# Altium PCB main_pcb.PcbDoc
Units mil, origin at the board's own origin, x right, y up, seen from the top; angles counter-clockwise.
Board outline 6000 x 4000 mil, 2 copper layers (Top Layer, Bottom Layer); 33 components, 41 nets, 316 pads, 14 vias.
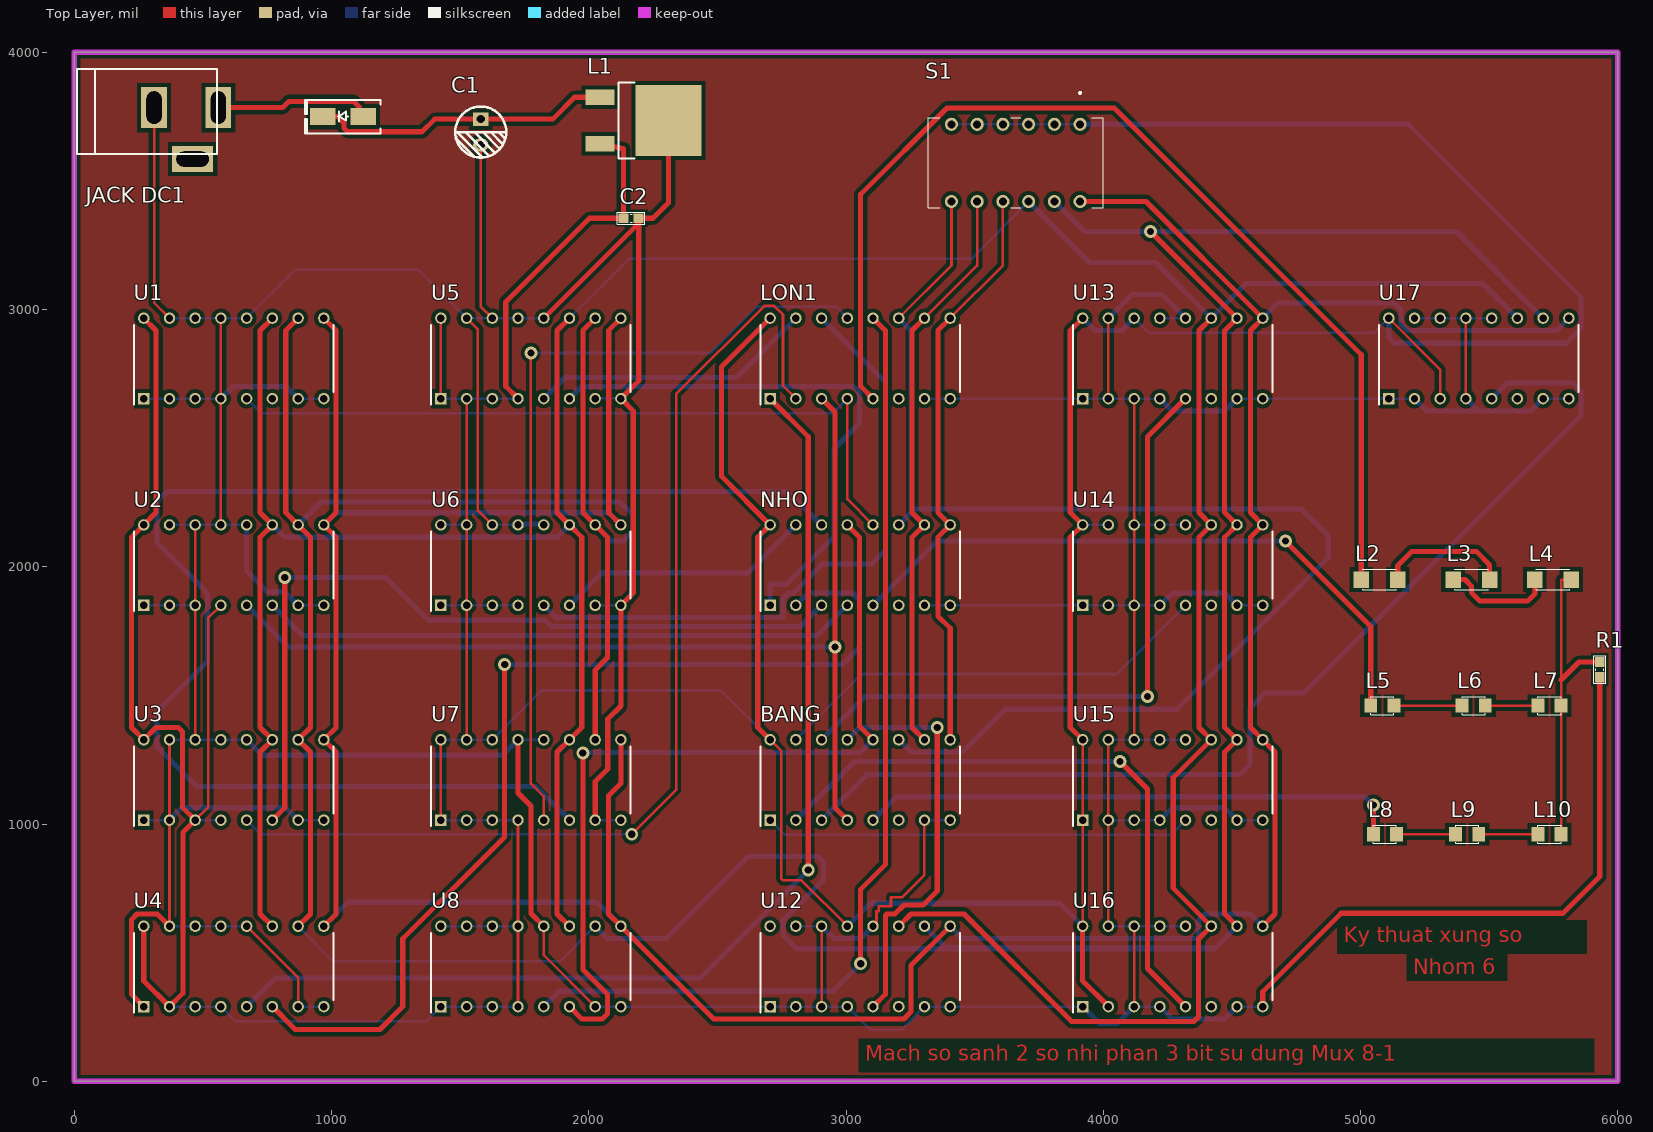
[diagram p0: Top Layer view]
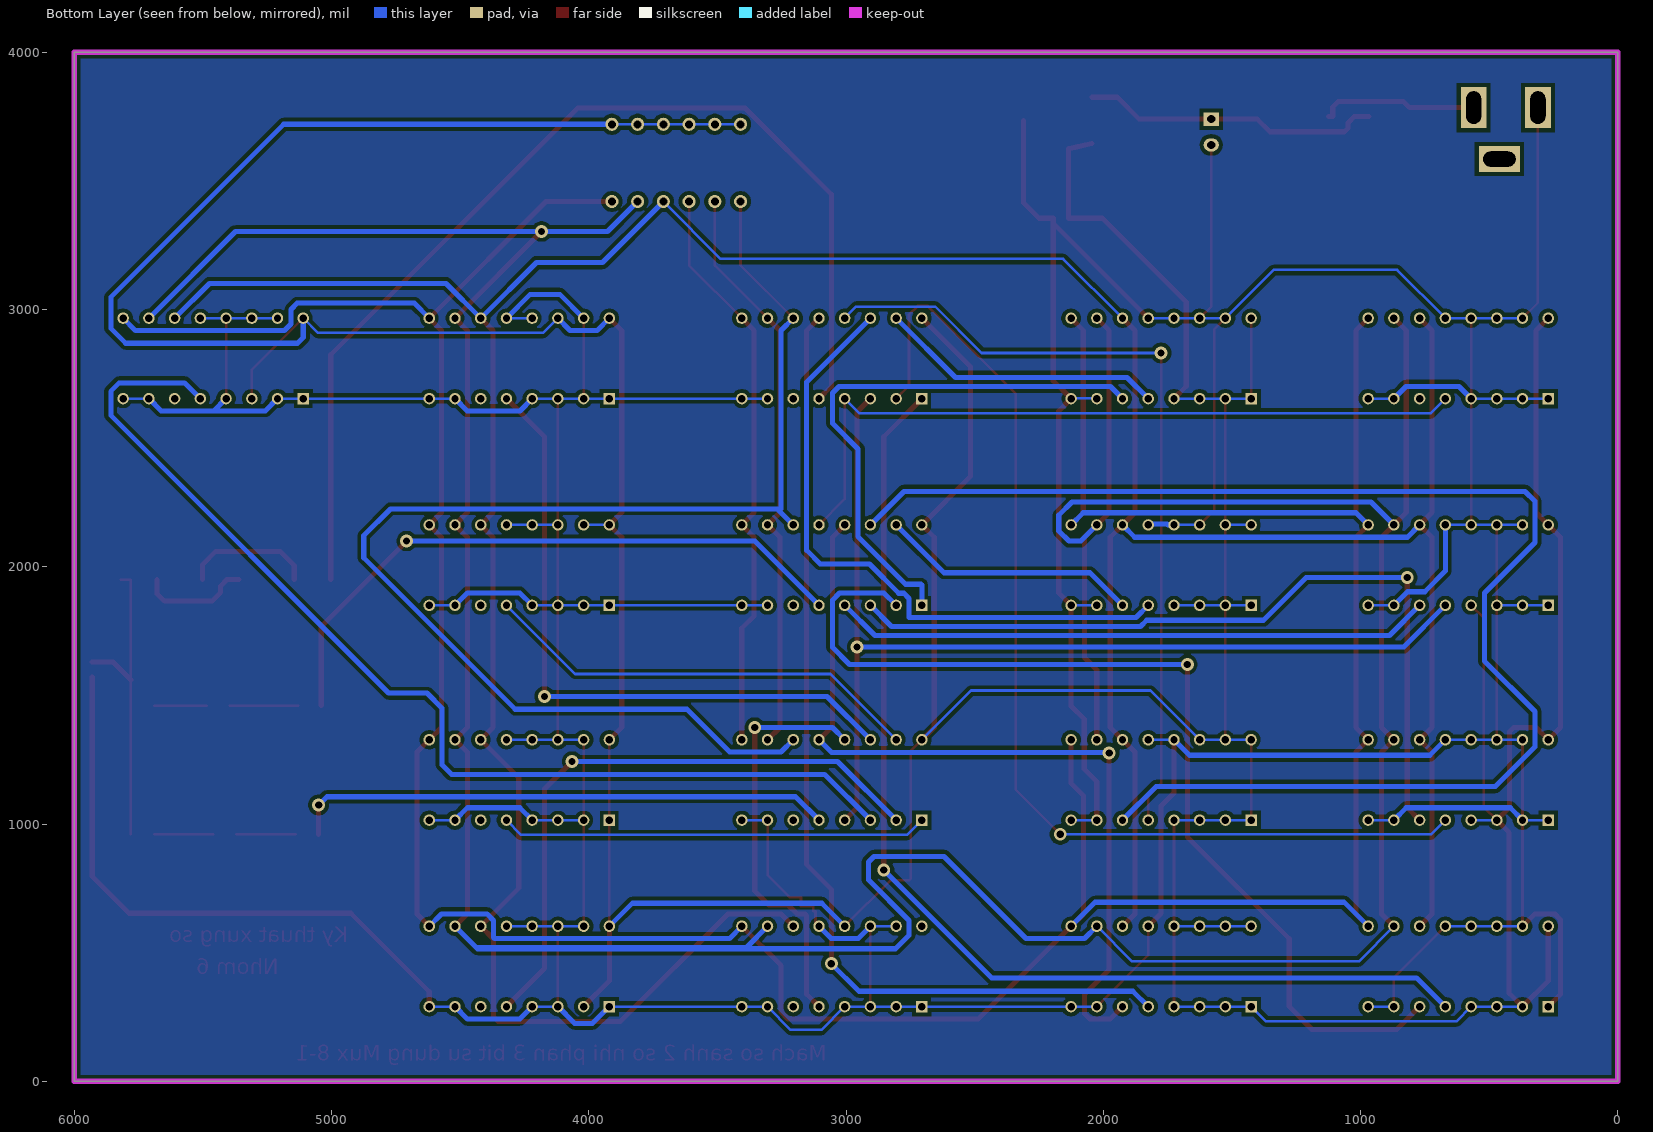
[diagram p1: Bottom Layer view, seen from below]
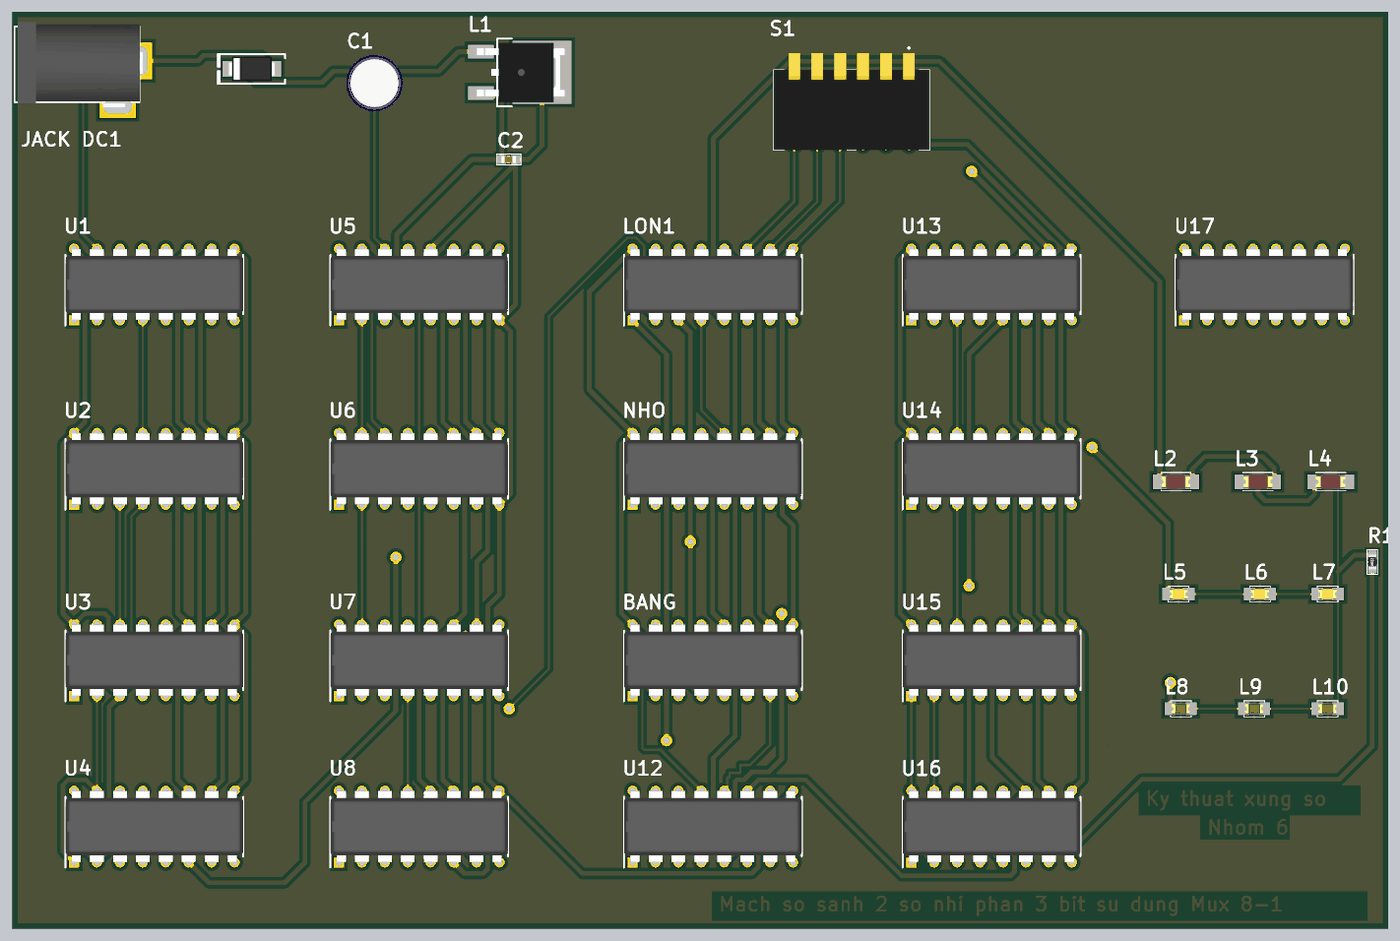
[diagram p2: 3D render of the assembled board from above, using the file's embedded part models]

## Layer stack, top to bottom
Top Solder: solder mask 0.4, Solder Resist, Dk 3.5
Top Layer: signal copper 1.4
Dielectric 1: dielectric 12.6, FR-4, Dk 4.8
Bottom Layer: signal copper 1.4
Bottom Solder: solder mask 0.4, Solder Resist, Dk 3.5

## Board outline
0,0 6000,0 6000,4000 0,4000

## Design rules (kind name [scope] priority, off if disabled: settings)
Clearance [All] p1: gap=15 ignorepadtopadclearanceinfootprint=FALSE
PolygonConnect [All] p1: connectstyle=Relief reliefconductorwidth=10 reliefentries=4 polygonreliefangle="90 Angle" airgapwidth=10
RoutingVias [All] p1: holewidth=28 width=50 viastyle="Through Hole" minholewidth=28 minwidth=50 maxholewidth=28 maxwidth=50
SolderMaskExpansion [All] p1: expansion=4 istentingtop=FALSE
Width [All] p1: maxlimit=40 minlimit=10 preferedwidth=20
30 further rules are at their usual default settings.

## Classes and differential pairs
component class Main_logiv: BANG LON1 NHO U1 U2 U3 U4 U5 U6 U7 U8 U12 U13 U14 U15 U16 U17

## Components (designator, comment, footprint, x,y, rotation, side; value= is the part's Value field where it differs from the comment)
BANG "SN74HC151N" DIP794W53P254L1930H508Q16N 3055,1171.3 r90 top
C1 "0.33uF" "tu hoa 5mm" 1580,3690 r270 top
C2 "101" "tu 0603" 2164.53,3355 r0 top
"JACK DC1" "JACK DC 5.5" "JACK DC 5.5" 435,3685 r0 top value="Jac DC"
L1 "L7805CDT-TR" DPAK_118_446_112X59_SMD 2202.64,3740 r0 top
L2 "LED 0805" LED-1206-Red 5003,1950 r0 top
L3 "LED 0805" LED-1206-Red 5502,1950 r180 top
L4 "LED 0805" LED-1206-Red 5678,1950 r0 top
L5 "LED 0805" LED-0805-Yellow 5040,1460 r0 top
L6 "LED 0805" LED-0805-Yellow 5395,1460 r0 top
L7 "LED 0805" LED-0805-Yellow 5690,1460 r0 top
L8 "LED 0805" LED-0805-Green 5050,960 r0 top
L9 "LED 0805" LED-0805-Green 5370,960 r0 top
L10 "LED 0805" LED-0805-Green 5690,960 r0 top
LON1 "SN74HC151N" DIP794W53P254L1930H508Q16N 3055,2810 r90 top
NHO "SN74HC151N" DIP794W53P254L1930H508Q16N 3055,2006.3 r90 top
R1 "10k" "tro smd 0603" 5930,1600 r90 top
S1 "A6DR-6100" A6DR6100 3910,3720 r180 top
U1 "SN74HC151N" DIP794W53P254L1930H508Q16N 620,2810 r90 top
U2 "SN74HC151N" DIP794W53P254L1930H508Q16N 620,2006.3 r90 top
U3 "SN74HC151N" DIP794W53P254L1930H508Q16N 620,1171.3 r90 top
U4 "SN74HC151N" DIP794W53P254L1930H508Q16N 620,446.3 r90 top
U5 "SN74HC151N" DIP794W53P254L1930H508Q16N 1775,2810 r90 top
U6 "SN74HC151N" DIP794W53P254L1930H508Q16N 1775,2006.3 r90 top
U7 "SN74HC151N" DIP794W53P254L1930H508Q16N 1775,1171.3 r90 top
U8 "SN74HC151N" DIP794W53P254L1930H508Q16N 1775,446.3 r90 top
U12 "SN74HC151N" DIP794W53P254L1930H508Q16N 3055,446.3 r90 top
U13 "SN74HC151N" DIP794W53P254L1930H508Q16N 4270,2810 r90 top
U14 "SN74HC151N" DIP794W53P254L1930H508Q16N 4270,2006.3 r90 top
U15 "SN74HC151N" DIP794W53P254L1930H508Q16N 4270,1171.3 r90 top
U16 "SN74HC151N" DIP794W53P254L1930H508Q16N 4270,446.3 r90 top
U17 "SN74HC151N" DIP794W53P254L1930H508Q16N 5460,2810 r90 top
? "M7" "DIODE SMA" 1045,3750 r180 top

## Footprints (in the part's own frame and the unit in brackets; to place one, negate y for a bottom-side part, rotate by r counter-clockwise, add the part's x,y. Pads: shape width x height; smd on the part's side, far side on the other; paste and mask are expansions set on the pad)
A6DR6100 [mm]
  round 1.3 hole 0.8: A1(0,0) A2(2.54,0) A3(5.08,0) A4(7.62,0) A5(10.16,0) A6(12.7,0) B1(0,7.62) B2(2.54,7.62) B3(5.08,7.62) B4(7.62,7.62) B5(10.16,7.62) B6(12.7,7.62)
  silkscreen extent -2.3,-3.2 15,8.26, body extent -2.3,-2.52 15,8.23, height 7.52
"DIODE SMA" [mm] "SMA"
  rect 2.5x1.7 smd: 1(-2,0) 2(2,0)
  silkscreen extent -3.68,-1.65 3.75,1.65, body extent -2.6,-1.37 2.6,1.37, height 2.4
DIP794W53P254L1930H508Q16N [mm]
  rect 1.13x1.13 hole 0.73: 1(-3.97,8.89)
  round 1.13 hole 0.73: 2(-3.97,6.35) 3(-3.97,3.81) 4(-3.97,1.27) 5(-3.97,-1.27) 6(-3.97,-3.81) 7(-3.97,-6.35) 8(-3.97,-8.89) 9(3.97,-8.89) 10(3.97,-6.35) 11(3.97,-3.81) 12(3.97,-1.27) 13(3.97,1.27) 14(3.97,3.81) 15(3.97,6.35) 16(3.97,8.89)
  silkscreen extent -4.53,-9.84 3.3,9.84, body extent -3.94,-9.84 3.94,9.84, height 5.09
DPAK_118_446_112X59_SMD [mm] "CASE: DPAK"
  rect 2.85x1.5 smd: 1(-4.023,2.163) 3(-4.023,-2.417)
  rect 6.5x7 smd: 2(2.727,-0.127)
  silkscreen extent -2.22,-3.9 -0.62,3.6, body extent -4.47,-3.43 5.23,3.15, height 2.3
"JACK DC 5.5" [mil] "Jac DC input"
  rect 100x160 hole 59.06 slot 125.98 at 90 deg: 1(125,100) 2(-125,100)
  rect 160x100 hole 59.06 slot 125.98 at 0 deg: 3(25,-100)
  silkscreen extent -425,-80 120,250, body extent -410,-105 134,269, height 434
LED-0805-Green [mil]
  rect 50x55 smd: 1(0,0) 2(90,0)
  silkscreen extent 0,-35 90,35, body extent 5,-25 85,25, height 43
LED-0805-Yellow [mil]
  rect 50x55 smd: 1(0,0) 2(90,0)
  silkscreen extent 0,-35 90,35, body extent 5,-25 85,25, height 43
LED-1206-Red [mil]
  rect 60x65 smd: 1(0,0) 2(142,0)
  silkscreen extent 6,-40 136,40, body extent 7,-31 133,32, height 43
"tro smd 0603" [mm] "Chip Capacitor, 2-Leads, Body 1,60x0,80mm, IPC Medium Density"
  rect 1x0.95 smd mask+0.076: 1(-0.75,0) 2(0.75,0)
  silkscreen extent -1.35,-0.58 1.37,0.58, body extent -0.82,-0.42 0.82,0.43, height 0.44
"tu 0603" [mm] "Chip Capacitor, 2-Leads, Body 1,60x0,80mm, IPC Medium Density"
  rect 1x0.95 smd mask+0.076: 1(-0.75,0) 2(0.75,0)
  silkscreen extent -1.35,-0.58 1.37,0.58, body extent -0.8,-0.4 0.8,0.4, height 0.9
"tu hoa 5mm" [mm]
  rect 1.3x1.5 hole 0.8: 1(-1.27,0)
  oval 1.3x1.5 hole 0.8: 2(1.27,0)
  silkscreen extent -2.51,-2.51 2.51,2.51, body extent -3.12,-3.18 3.23,3.18, height 14.55

## Part data
BANG LON1 NHO U1 U2 U3 U4 U5 U6 U7 U8 U12 U13 U14 U15 U16 U17: "Integrated Circuit", Manufacturer_Name="Texas Instruments", Mouser Part Number=595-SN74HC151N, Datasheet Link=https://www.ti.com/lit/gpn/SN74HC151, Height=5.08mm, Manufacturer_Part_Number=SN74HC151N, Mouser Price/Stock=https://www.mouser.co.uk/ProductDetail/Texas-Instruments/SN74HC151N?qs=st7IWvlL5%2FgZ0EYsqHF4AQ%3D%3D
C1: library part "Tu Hoa 0.33uF 50V 5x11", "Cắm", Chung_Loai=Cắm, Don_Vi=Con, Ma_Hang=MH004655, So_Chan=2, Ten_Linh_Kien="Tụ Hóa 0.33uF 50V 5x11MM"
C2: library part "Tu 0603 101 50V 10%", "Dán", Chung_Loai=Dán, Don_Vi=Con, Ma_Hang=MH004565, So_Chan=2, Ten_Linh_Kien="Tụ 0603 101-0.1nF 10% 50V"
L1: library part REG_35V_5V-1.5A-7.5W-DPAK, "Linear Voltage Regulator IC 1 Output 1.5A DPAK", Alternate Part Number-1="CJ7805 3%", Case/Package=DPAK, Manufacturer=Diodes, Manufacturer Part Number=L7805CDT-TR, Supplier Part Number-1=L7805CDT-TR, Supplier-1="SP ROAD"
L2 L3 L4: library part "LED 1206 Do", "Dán", Chung_Loai=Dán, Don_Vi=Con, Ma_Hang=MH002334, Ten_Linh_Kien="LED1206 Màu Đỏ (Red)"
L5 L6 L7: library part "LED 0805 Vang", "Dán", Chung_Loai=Dán, Don_Vi=Con, Ma_Hang=MH002329, Ten_Linh_Kien="LED 0805 Màu Vàng ( Yellow)"
L8 L9 L10: library part "LED 0805 Xanh La", "Dán", Chung_Loai=Dán, Don_Vi=Con, Ma_Hang=MH002326, Ten_Linh_Kien="LED 0805 Màu Xanh Lá (Green)"
R1: library part "Tro 0603 5% 10k", "Dán", Chung_Loai=Dán, Don_Vi=Con, Ma_Hang=MH006316, So_Chan=2, Ten_Linh_Kien="Trở 0603 5% 10k"
S1: "Switch", Manufacturer_Name="OMRON Electronics", Mouser Part Number=653-A6DR-6100, Datasheet Link=https://componentsearchengine.com/Datasheets/2/A6DR-6100.pdf, Height=7.4mm, Manufacturer_Part_Number=A6DR-6100, Mouser Price/Stock=https://www.mouser.co.uk/ProductDetail/Omron-Electronics/A6DR-6100?qs=Pjd0UV7BHP9H24KYn64LLg%3D%3D
?: library part "Diode M7 ( 4007 )", "Dán", Chung_Loai=Dán, Don_Vi=Con, Ma_Hang=MH000944, Ten_Linh_Kien="Diode M7 1N4007 SMD 1A 1000V"

## Via types
v1: diameter 50, hole 28, Top Layer to Bottom Layer, 14 vias

## Nets (pads, with @x,y where several pads share a name; then routed paths per layer and width w, separated by ;. In a path a pad name is that pad's centre, name@x,y a point inside that pad or via, vN(x,y) a via of type N, cw(c..) or ccw(c..) an arc to the next point about the centre after c; other vN are vias at no path point)
A0: S1.B1 U1.9 U2.9 U3.9 U4.9 U5.9 U6.9 U7.9 U8.9 U12.9 U13.9 U14.9 U15.9 U16.9 U17.9 | length 14226.1
  Top Layer w20: U4.9 1018,650.6 1018,1279.6 U3.9 1018,1375.6 1018,2114.6 U2.9 1018,2210.6 1018,2918.3 U1.9 ; U7.9 2125,1158 2077,1110 2077,650.6 U8.9 2485.6,242 3225,242 3253,270 3253,450.6 U12.9 ; U6.9 2077.75,2209.84 2077.75,2919.05 U5.9 ; S1.B1 4166.3,3420 U13.9 4572,2918.3 4572,2210.6 U14.9 4572,2114.6 4572,1375.6 U15.9 4668,1279.6 4668,650.6 U16.9
  Bottom Layer w20: U4.9 1063.4,696 2031.6,696 U8.9 ; U2.9 1017.4,2210 2077.6,2210 U6.9 ; U12.9 3452.25,555.35 4367,555.35 4370,558.35 4370,625 4395,650 4572.6,650 U16.9 ; U13.9 4678.7,3025 5133,3025 5158,3000 5158,2943.5 5182.5,2919 5762.7,2919 U17.9
A1: S1.B2 U1.10 U2.10 U3.10 U4.10 U5.10 U6.10 U7.10 U8.10 U12.10 U13.10 U14.10 U15.10 U16.10 U17.10 | length 16517.7
  Top Layer w20: U4.10 918,650.6 918,1279.6 U3.10 918,1375.6 918,2114.6 U2.10 822,2210.6 822,2918.3 U1.10 ; U7.10 2025,1599 2073,1647 2073,2114.6 U6.10 1977,2210.6 1977,2918.3 U5.10 ; v1(4183.3,3303) U13.10 4472,2918.3 4472,2210.6 U14.10 4472,2114.6 4472,1375.6 U15.10 4472,1279.6 4472,650.6 U16.10
  Bottom Layer w10: U4.10 1006.6,466 1888.4,466 U8.10
  Bottom Layer w20: U2.10 959.4,2252 2121,2252 2173,2200 2173,2139.4 2133.6,2100 2087.6,2100 U6.10 ; U8.10 2072.6,555 2300,555 2619,874 2891,874 2913,852 2913,783 2755,625 2755,567.35 2807.35,515 4432.4,515 4437.75,520.35 ; U12.10 3387.25,520.35 4437.75,520.35 ; S1.B2 3927,3303 v1(4183.3,3303) 5373.3,3303 U17.10 ; U16.10 4437.75,520.35
A2: S1.B3 U1.11 U2.11 U3.11 U4.11 U5.11 U6.11 U7.11 U8.11 U12.11 U13.11 U14.11 U15.11 U16.11 U17.11 | length 14637.5
  Top Layer w20: U4.11 722,650.6 722,1279.6 U3.11 722,1375.6 722,2114.6 U2.11 722,2210.6 722,2918.3 U1.11 ; U8.11 1877,650.6 1877,1279.6 U7.11 1973,1375.6 1973,2114.6 U6.11 1877,2210.6 1877,2918.3 U5.11 ; U12.11 3252.4,650 3459.25,650 3877.25,232 4352,232 4370,250 4370,552.6 U16.11 4272,750.6 4272,1179.6 U15.11 4372,1375.6 4372,2114.6 U14.11 4372,2210.6 4372,2918.3 U13.11
  Bottom Layer w10: U5.11 2155.7,3197 3487,3197 S1.B3
  Bottom Layer w20: U2.11 817.6,2115 1877.4,2115 U6.11 ; S1.B3 3947,3183 4203.3,3183 U13.11 4555.05,3101.35 5474.95,3101.35 U17.11
B0-L1: BANG.4 LON1.3 U2.5 | length 4034.2
  Top Layer w20: LON1.3 2957,2601.7 v1(2957,1688) 2957,1063 BANG.4
  Bottom Layer w20: U2.5 832,1688 v1(2957,1688)
B1: BANG.3 U17.5 | length 4213.9
  Bottom Layer w20: BANG.3 3082.94,1192.94 4532.94,1192.94 4570,1230 4570,1450 4629,1509 4778,1509 5858,2589 5858,2682 5825,2715 5571.3,2715 U17.5
B2: BANG.2 U16.5 | length 2413.1
  Top Layer w20: v1(4065,1243) 4172,1136 4172,438 U16.5
  Bottom Layer w20: BANG.2 3033,1243 v1(4065,1243)
B3: BANG.1 U15.5 | length 1662.4
  Bottom Layer w10: BANG.1 2762.25,957.75 4262.75,957.75 U15.5
B4: BANG.15 U14.5 | length 1731.4
  Bottom Layer w10: BANG.15 3060.4,1583 4053,1583 U14.5
B5: BANG.14 U13.5 | length 2555.8
  Top Layer w20: v1(4172,1496) 4172,2505.7 U13.5
  Bottom Layer w20: BANG.14 3073.4,1496 v1(4172,1496)
B6: BANG.13 U12.5 | length 1620.8
  Top Layer w20: U12.5 3153,338 3153,644.84 3158,649.84 3189.84,649.84 3225,685 3300,685 3355,740 v1(3355,1375)
  Bottom Layer w20: BANG.13 3052.4,1375 v1(3355,1375)
C0: BANG.9 LON1.9 NHO.9 S1.B4 | length 2256.8
  Top Layer w10: LON1.9 3610,3171.3 S1.B4
  Top Layer w20: BANG.9 3405,1761 3357,1809 3357,2114.6 NHO.9 3357,2210.6 3357,2918.3 LON1.9
C1: BANG.10 LON1.10 NHO.10 S1.B5 | length 2256.8
  Top Layer w10: LON1.10 3510,3171.3 S1.B5
  Top Layer w20: BANG.10 3257,1375.6 3257,2114.6 NHO.10 3257,2210.6 3257,2918.3 LON1.10
C2: BANG.11 LON1.11 NHO.11 S1.B6 | length 5141.6
  Top Layer w10: LON1.11 3410,3171.3 S1.B6
  Bottom Layer w20: BANG.11 3252.6,1280 3452,1280 3618,1446 4286,1446 4875,2035 4875,2121 4771,2225 3267.4,2225 ; NHO.11 3267.4,2225 ; LON1.11 3253,2918.3 3253,2225 3267.4,2225
GND: "JACK DC1.2" BANG.7 BANG.8 C1.2 C2.2 L1.2 LON1.7 LON1.8 NHO.7 NHO.8 R1.1 U1.1 U1.2 U1.3 U1.4 U1.7 U1.8 U1.12 U1.13 U1.14 U1.15 U2.1 U2.2 U2.3 U2.7 U2.8 U2.12 U2.13 U2.14 U2.15 U3.1 U3.2 U3.7 U3.8 U3.12 U3.13 U3.14 U3.15 U4.1 U4.7 U4.8 U4.12 U4.13 U4.14 U4.15 U5.7 U5.8 U5.12 U5.13 U5.14 U5.15 U6.7 U6.8 U6.12 U6.13 U6.14 U7.7 U7.8 U7.12 U7.13 U8.7 U8.8 U8.12 U12.1 U12.2 U12.3 U12.4 U12.7 U12.8 U12.12 U12.14 U12.15 U13.1 U13.2 U13.3 U13.4 U13.7 U13.8 U13.12 U13.13 U13.15 U14.1 U14.2 U14.3 U14.4 U14.7 U14.8 U14.12 U14.13 U14.14 U15.2 U15.3 U15.4 U15.7 U15.8 U15.12 U15.13 U15.14 U15.15 U16.1 U16.3 U16.4 U16.7 U16.8 U16.12 U16.13 U16.14 U16.15 U17.1 U17.2 U17.4 U17.7 U17.8 U17.12 U17.13 U17.14 U17.15 | length 32411.1
  Top Layer w10: 310,3785 310,3026.3 U1.15 ; U4.15 U3.2 U3.15 ; U3.14 U2.3 U2.14 ; U2.13 U1.4 U1.13 ; U4.12 870,402.6 U4.7 ; U5.15 1569,2922.3 1569,2218.6 U6.14 ; C1.2 1580,3011.3 U5.14 ; U8.12 1825,490 U8.7 ; U12.3 U12.14 ; U12.12 3118.46,616.05 3118.46,661.17 3127.75,661.17 3127.75,679.84 3175,679.84 3175,715 3217.4,715 3305,802.6 BANG.7 ; U16.15 U15.2 U15.15 ; U13.2 U13.15 ; U16.3 U16.14 ; U15.14 U14.3 U14.14 U13.3 ; U17.4 U17.13
  Top Layer w20: U4.1 222,338 222,628 244,650 322.6,650 U4.15 ; U7.13 1725,1120 1775,1070 1775,652.6 U8.12 ; U5.12 2194.06,3335.36 ; U7.7 2025,1165 2074,1214 2074,1408 2125,1459 U6.8 2173,1898 2173,2605.7 U5.8 2194.06,2722.76 2194.06,3335.36 ; L1.2 2310,3415 2250,3355 C2.2 2194.06,3335.36 ; U16.8 4620,348 4925,653 5787,653 5930,796 R1.1
  Bottom Layer w10: U3.1 U3.2 ; U2.1 U2.2 U2.3 ; U1.1 U1.2 U1.3 U1.4 ; U4.15 U4.14 U4.13 U4.12 ; U3.15 U3.14 U3.13 U3.12 ; U2.15 U2.14 U2.13 U2.12 ; U1.15 U1.14 U1.13 U1.12 857.7,3154 1337.3,3154 U5.15 U5.14 U5.13 U5.12 ; U4.7 U4.8 ; U3.7 U3.8 ; U2.7 U2.8 ; U1.7 U1.8 ; U6.14 U6.13 ; U7.13 U7.12 ; U8.7 U8.8 U12.1 U12.2 U12.3 U12.4 3095,200 3215,200 U12.7 U12.8 U16.1 ; U7.7 U7.8 ; U6.7 U6.8 ; U5.7 2026.15,2654.85 2123.85,2654.85 U5.8 ; U12.15 U12.14 ; BANG.7 BANG.8 ; NHO.7 NHO.8 U14.1 U14.2 U14.3 U14.4 ; LON1.7 LON1.8 U13.1 U13.2 U13.3 U13.4 ; U16.15 U16.14 U16.13 U16.12 ; U15.2 U15.3 U15.4 ; U15.15 U15.14 U15.13 U15.12 ; U16.3 U16.4 ; U14.14 U14.13 U14.12 ; U13.13 U13.12 ; U16.7 U16.8 ; U15.7 U15.8 ; U14.7 U14.8 ; U13.7 U13.8 U17.1 U17.2 ; U17.15 U17.14 U17.13 U17.12 ; U17.7 U17.8
  Bottom Layer w20: U3.2 418,1063 822,1063 U3.7 ; U1.4 617.3,2701 822.7,2701 U1.7 ; U3.12 730.6,1267 1664.4,1267 U7.13 ; U2.12 670,1983 750,1903 817,1903 U2.7 ; U6.13 1747.75,2162.6 1751.92,2166.77 1820.83,2166.77 U6.12 ; U12.14 2952.6,555 3057.4,555 U12.12 ; U16.1 3985,225 4055,225 U16.3 ; U13.15 4112.7,3059 4227.3,3059 U13.12 ; U16.4 4268,242 4472,242 U16.7 ; U15.4 4268,1063 4472,1063 U15.7 ; U14.4 4268,1898 4472,1898 U14.7 ; U13.4 4267.7,2606 4472.3,2606 U13.7 ; U17.2 5257.7,2606 5457.7,2606 ; U17.4 5457.7,2606 ; U17.7 5662.3,2606 5457.7,2606
L2: LON1.2 U3.5 | length 4220.6
  Top Layer w10: v1(2167,960) 2340,1133 2340,2671 2683,3014 2721,3014 2755,2980 2755,2703.7 LON1.2
  Bottom Layer w10: U3.5 725,960 v1(2167,960)
L3: LON1.1 U4.5 | length 4297
  Top Layer w20: LON1.1 2853,2505.7 v1(2853,821)
  Bottom Layer w20: U4.5 782,402 2434,402 v1(2853,821)
L4: LON1.15 U5.5 | length 1109.5
  Bottom Layer w20: U5.5 1907.25,2735.95 2574.65,2735.95 LON1.15
L5: LON1.14 U6.5 | length 2504.3
  Bottom Layer w20: U6.5 1872.25,1802.75 2755,1802.75 2755,1877 2775,1897 2795,1897 2909,2011 3100,2011 3153,2064 3153,2718.3 LON1.14
L6: LON1.13 U7.5 | length 3159.8
  Top Layer w10: v1(1775,2831) 1775,1157 1825,1107 U7.5
  Bottom Layer w10: v1(1775,2831) 2473,2831 2653,3011 2960.3,3011 LON1.13
L7: LON1.12 U8.5 | length 3870.1
  Top Layer w20: v1(3057,457) 3057,746 3153,842 3153,2918.3 LON1.12
  Bottom Layer w20: U8.5 1885,350 2950,350 v1(3057,457)
LED1: L2.1 LON1.5 | length 4171
  Top Layer w20: LON1.5 3057,2701.7 3057,3448 3393,3784 4043,3784 5003,2824 L2.1
LED2: L5.1 NHO.5 | length 2484.1
  Top Layer w20: v1(4708,2100) 5040,1768 L5.1
  Bottom Layer w20: NHO.5 3355,2100 v1(4708,2100)
LED3: BANG.5 L8.1 | length 2109.9
  Top Layer w20: L8.1 v1(5050,1074)
  Bottom Layer w20: BANG.5 3196,1106 5018,1106 v1(5050,1074)
N0: NHO.4 U2.6 | length 2332.1
  Bottom Layer w20: U2.6 887.25,1732.75 2887.75,1732.75 NHO.4
N1: NHO.3 U3.6 | length 3162.8
  Top Layer w20: U3.6 818,1063 v1(818,1958)
  Bottom Layer w20: v1(818,1958) 1211,1958 1377,1792 1830.75,1792 1855,1767.75 2822.75,1767.75 NHO.3
N2: NHO.2 U4.6 | length 3945
  Top Layer w20: U4.6 859,201 1188,201 1277,290 1277,554 1673,950 v1(1673,1620)
  Bottom Layer w20: v1(1673,1620) 2986,1620 3053,1687 3053,1870 3025,1898 2853,1898 NHO.2
N3: NHO.1 U5.6 | length 2162.4
  Bottom Layer w20: U5.6 1972.25,2700.95 3027.05,2700.95 3053,2675 3053,2558 2953,2458 2953,2117 2768.25,1932.25 2708.54,1932.25 2705,1928.71 NHO.1
N4: NHO.15 U6.6 | length 1009.5
  Bottom Layer w20: U6.6 2051.73,1976.73 2619.14,1976.73 NHO.15
N5: NHO.14 U7.6 | length 5491.2
  Bottom Layer w20: U7.6 1794,1146 476,1146 322,1300 322,1437 518,1633 518,1898 322,2094 322,2255 360,2293 2774.6,2293 NHO.14
N6-B7: BANG.12 NHO.13 U8.6 | length 3255.4
  Top Layer w20: U8.6 1973,242 2052.5,242 2073,262.5 2073,338 1977,434 v1(1977,1276) ; NHO.13 3053,2114.6 3053,1379.6 BANG.12
  Bottom Layer w20: v1(1977,1276) 1979,1278 3055.4,1278 BANG.12
N7-L0: LON1.4 NHO.12 U1.5 | length 2914.9
  Top Layer w10: LON1.4 3005,2262.6 NHO.12
  Bottom Layer w10: U1.5 727.25,2596.45 2947.75,2596.45 LON1.4
Net_1: "JACK DC1.1" ?.1 | length 620.1
  Top Layer w20: 560,3785 810,3785 834,3809 1086.5,3809 1108,3787.5 1108,3750 ?.1
Net_2: ?.2 C1.1 L1.1 | length 1170
  Top Layer w20: ?.2 1024,3750 1049,3725 1049,3704.5 1062.5,3691 1352,3691 1401,3740 C1.1 1859.84,3740 1945,3825.16 L1.1
NetL2_2: L2.2 L3.1 | length 514.3
  Top Layer w20: L2.2 5145,2005 5200,2060 5450,2060 5502,2008 L3.1
NetL3_2: L3.2 L4.1 | length 433.6
  Top Layer w20: L3.2 5406,1950 5431,1925 5431,1900 5464,1867 5650,1867 5678,1895 L4.1
NetL5_2: L5.2 L6.1 | length 265
  Top Layer w10: L5.2 L6.1
NetL6_2: L6.2 L7.1 | length 205
  Top Layer w10: L6.2 L7.1
NetL8_2: L8.2 L9.1 | length 230
  Top Layer w10: L8.2 L9.1
NetL9_2: L9.2 L10.1 | length 230
  Top Layer w10: L9.2 L10.1
Ress: L4.2 L7.2 L10.2 R1.2 | length 1209
  Top Layer w10: L10.2 L7.2 5780,1559.53 5780,1950 L4.2
  Top Layer w20: 5780,1559.53 5850,1629.53 R1.2
VCC: BANG.16 C2.1 L1.3 LON1.16 NHO.16 S1.A1 S1.A2 S1.A3 S1.A4 S1.A5 S1.A6 U1.16 U2.4 U2.16 U3.3 U3.4 U3.16 U4.2 U4.3 U4.4 U4.16 U5.1 U5.2 U5.3 U5.4 U5.16 U6.1 U6.2 U6.3 U6.4 U6.15 U6.16 U7.1 U7.2 U7.3 U7.4 U7.14 U7.15 U7.16 U8.1 U8.2 U8.3 U8.4 U8.13 U8.14 U8.15 U8.16 U12.13 U13.14 U13.16 U14.15 U14.16 U15.1 U15.16 U16.2 U16.16 U17.3 U17.16 | length 24513.1
  Top Layer w10: U3.3 520,1065 520,1800 U2.4 ; U7.1 U7.16 ; U5.1 U5.16 ; U7.15 U6.2 U6.15 U5.2 ; U8.4 U8.13 U7.4 ; BANG.16 2747.75,1284.84 2747.75,788.25 2755,781 2826.6,781 U12.13 ; U16.16 U15.1 U15.16 ; U17.16 5310,2766.3 U17.3
  Top Layer w20: U4.16 270,390 U4.2 422,342 422,967 U3.3 420,1065 420,1359.21 404.21,1375 317.4,1375 U3.16 222,1375.6 222,2114.6 U2.16 318,2210.6 318,2918.3 U1.16 ; U5.4 1677,2701.7 1677,3029 2003,3355 C2.1 2135,3625 L1.3 ; BANG.16 2657,1375.6 2657,2114.6 NHO.16 2516,2351.6 2516,2777.3 LON1.16 ; U16.16 3920,390 U16.2 ; U15.16 3872,1375.6 3872,2114.6 U14.16 3872,2210.6 3872,2918.3 U13.16
  Bottom Layer w10: U4.2 U4.3 U4.4 627.25,232.75 1367.75,232.75 U8.1 U8.2 U8.3 U8.4 ; U3.3 U3.4 ; U8.16 U8.15 U8.14 U8.13 ; U7.1 U7.2 U7.3 U7.4 ; U7.16 U7.15 U7.14 1816.4,1519 2513.6,1519 BANG.16 ; U6.1 U6.2 U6.3 U6.4 ; U6.16 U6.15 ; U5.1 U5.2 U5.3 U5.4 ; S1.A6 S1.A5 S1.A4 S1.A3 S1.A2 S1.A1 ; U14.16 U14.15 ; U13.14 4177.25,2909.05 5052.75,2909.05 U17.16
  Bottom Layer w20: U12.13 3094.4,692 3830.6,692 U16.16 ; S1.A1 5186,3720 5858,3048 5858,2927 5800,2869 5131.85,2869 5110,2890.85 U17.16 ; U13.16 3967.3,2919 4072.7,2919 U13.14
pads on no net: "JACK DC1.3" BANG.6 LON1.6 NHO.6 U1.6 U12.6 U12.16 U13.6 U14.6 U15.6 U16.6 U17.6

## Polygon pours and split planes (outlines as drawn)
no net on Bottom Layer "NONET_L02_P000" (solid, pour order 0): -5,0 0,5 0,4000 6000,4000 6000,0 0,0
no net on Top Layer "NONET_L01_P001" (solid, pour order 1): 0,0 0,4000 6000,4000 6000,0

## Keep-outs
Keep-Out Layer:
  the board outline again, w20

## Other copper
Top Layer:
  text "Ky thuat xung so" at 4935,539.99 h60
  text "Nhom 6" at 5205,415 h60
  text "Mach so sanh 2 so nhi phan 3 bit su dung Mux 8-1" at 3075,79.99 h60